# Altium PCB GTU-V1.1-20160526 .PcbDoc (part 2 of 4)
Units mil, origin at the board's own origin, x right, y up, seen from the top; angles counter-clockwise.
Board outline 6299.21 x 4330.71 mil, 4 copper layers (Top Layer, POWER, GND, Bottom Layer); 208 components, 165 nets, 695 pads, 436 vias.
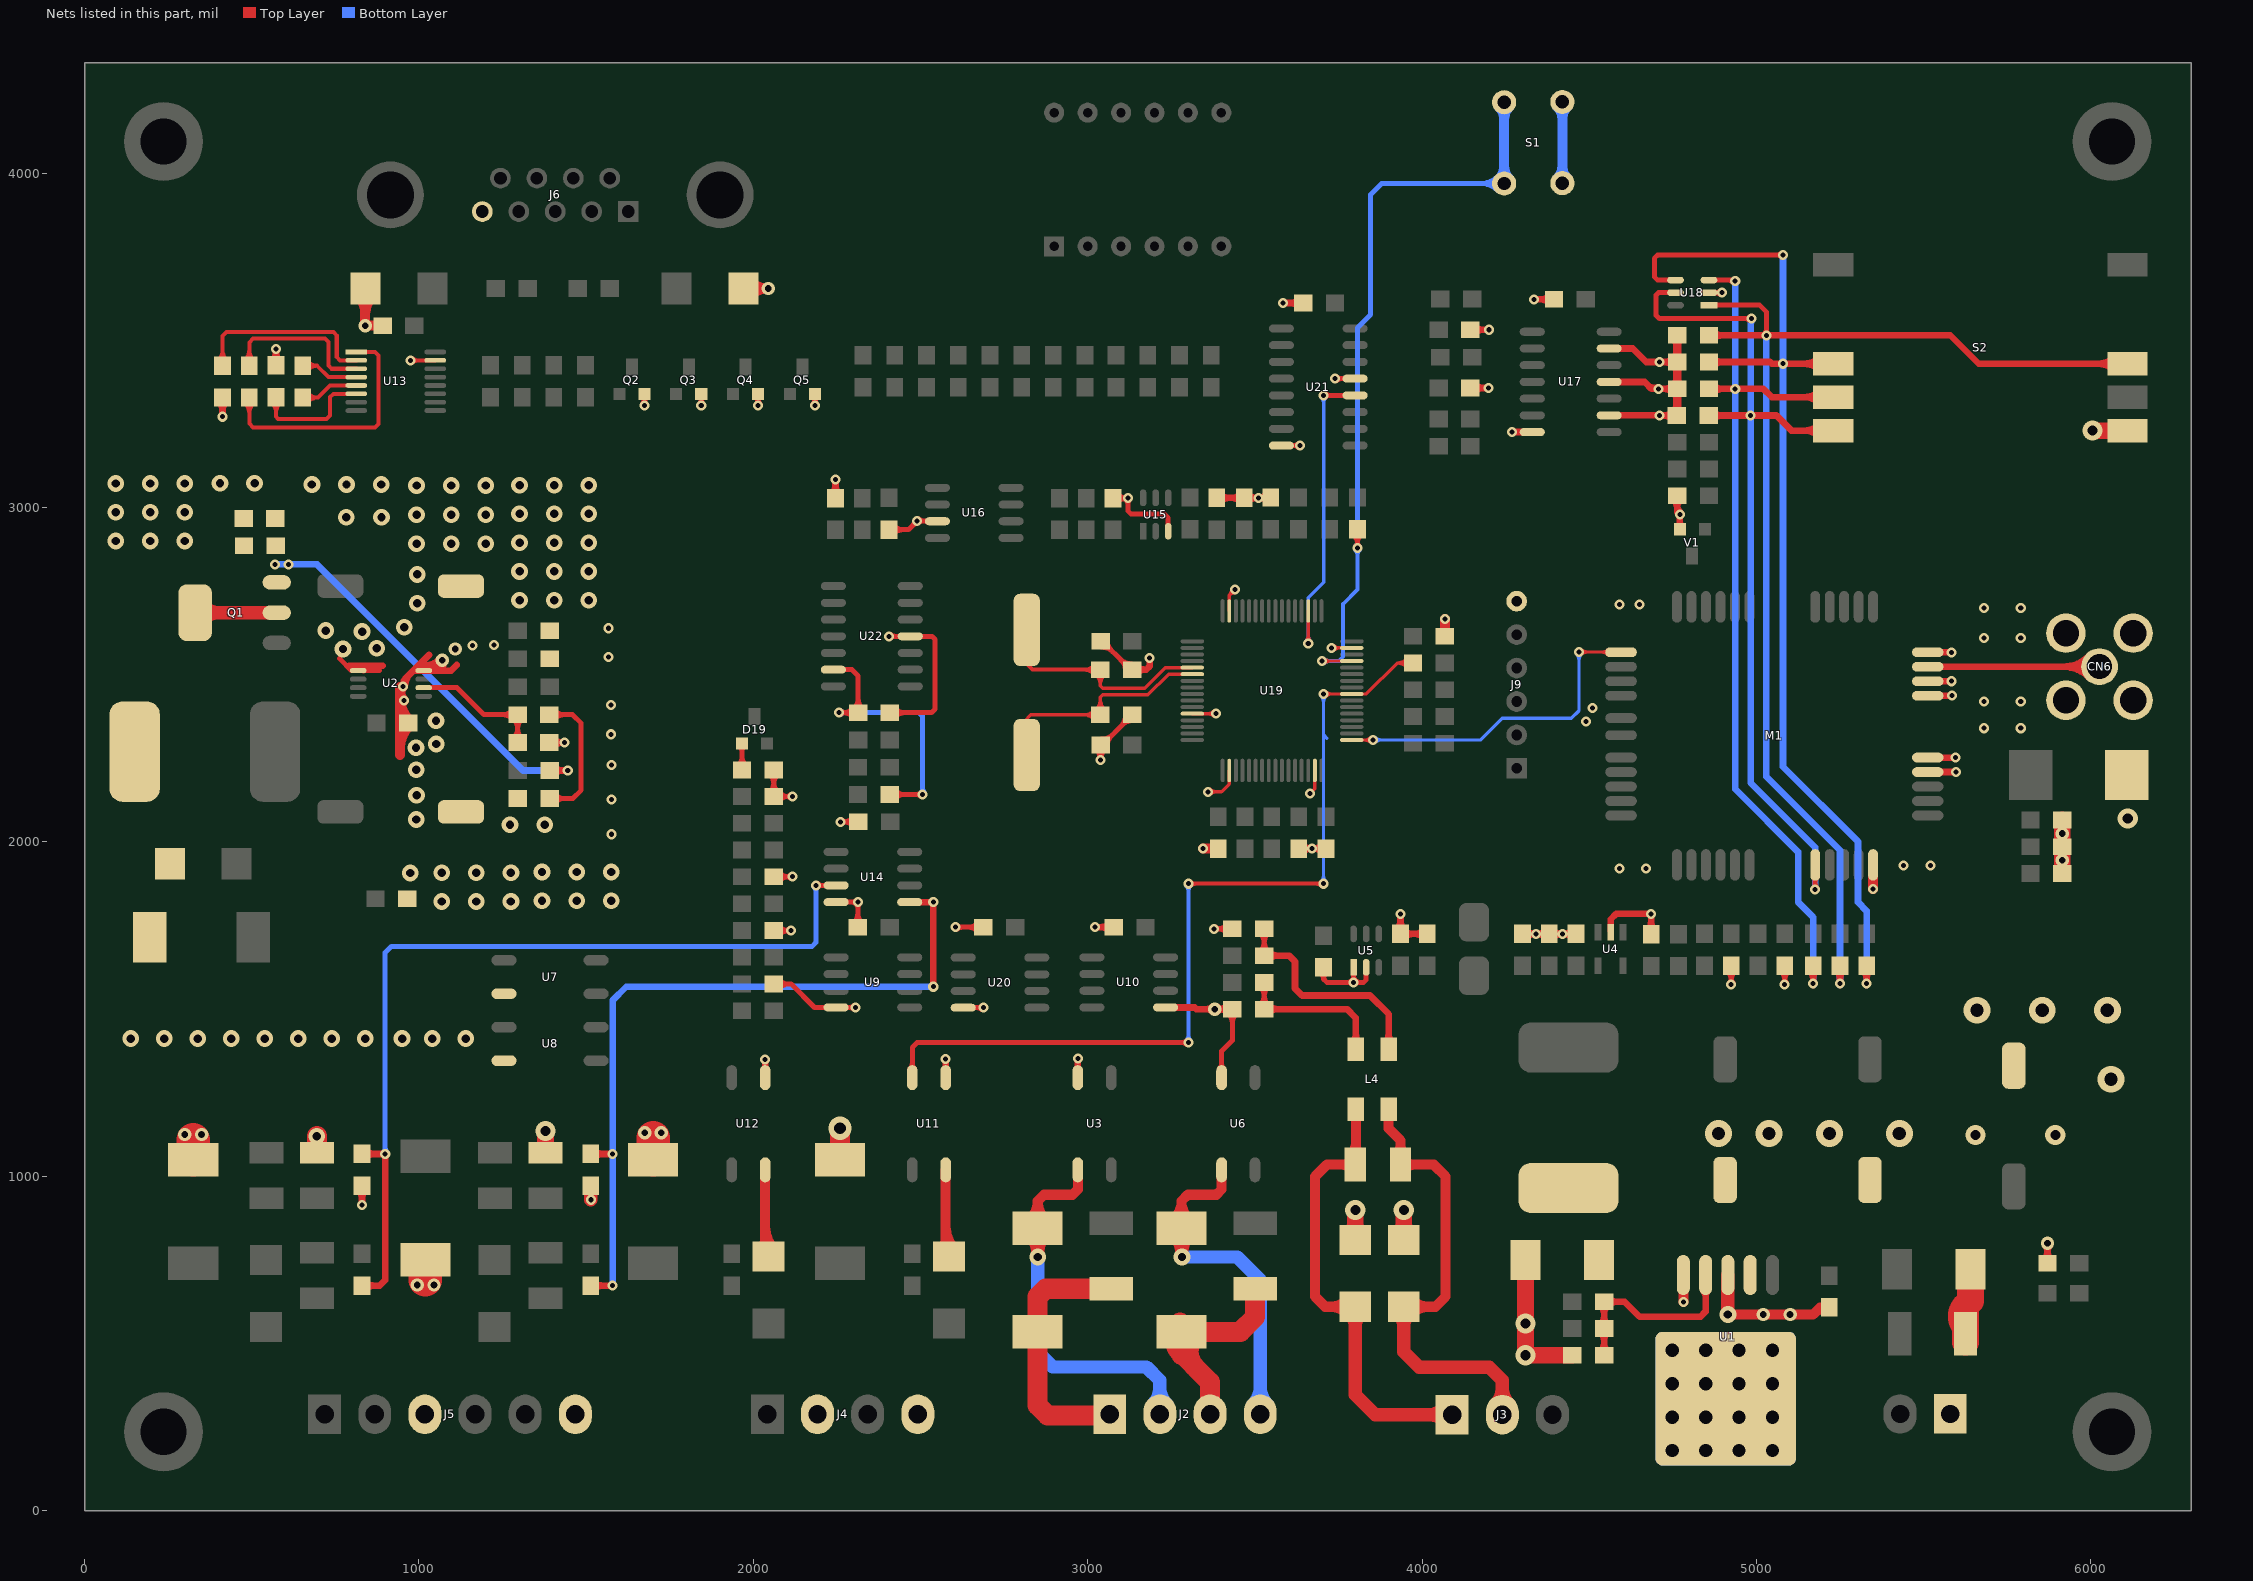
[diagram p4: the nets of this part, all layers, seen from the top]

## Via types
v1: diameter 30, hole 15, Top Layer to Bottom Layer, 277 vias
v2: diameter 50, hole 25, Top Layer to Bottom Layer, 85 vias
v3: diameter 40, hole 20, Top Layer to Bottom Layer, 36 vias
v4: diameter 40, hole 40, Top Layer to Bottom Layer, 16 vias
v5: diameter 80, hole 40, Top Layer to Bottom Layer, 12 vias
v6: diameter 60, hole 30, Top Layer to Bottom Layer, 9 vias
v7: diameter 70, hole 35, Top Layer to Bottom Layer, 1 vias

## Nets (pads, with @x,y where several pads share a name; then routed paths per layer and width w, separated by ;. In a path a pad name is that pad's centre, name@x,y a point inside that pad or via, vN(x,y) a via of type N, cw(c..) or ccw(c..) an arc to the next point about the centre after c; other vN are vias at no path point) (continued)
DK2: R22.1 U11.6 U19.40 | length 3068.8
  Top Layer w10: v1@3705.52,2442.52 3832.52,2442.52 3925,2535 ; v1@3712.07,2434.93 cw(c3730.4,2416.6) 3730.4,2442.52 ; v1@3712.07,2449.07 ccw(c3727.89,2464.89) 3727.89,2442.52 ; R22.1@3955.27,2521.57 ccw(c3925,2494.16) 3925,2535 ; R22.1@3955.27,2548.43 cw(c3925,2575.84) 3925,2535 ; R22.1@3972.6,2535 3925,2535
  Top Layer w12: v1(3301,1875) v1(3705,1875) ; v1@3307.36,1868.64 cw(c3322.73,1853.27) 3322.73,1875 cw(c3322.73,1896.73) v1@3307.36,1881.36 ; v1@3698.64,1868.64 ccw(c3683.27,1853.27) 3683.27,1875 ccw(c3683.27,1896.73) v1@3698.64,1881.36
  Top Layer w15: U11.6@2469.2,1322.51 ccw(c2454.69,1337.02) 2475.21,1337.02 ccw(c2495.73,1337.02) U11.6@2481.22,1322.51 ; U11.6@2475.21,1295 2475.21,1385.21 2490,1400 v1(3301,1400) ; v1@3295.7,1394.7 ccw(c3282.89,1381.89) 3282.89,1400 ccw(c3282.89,1418.11) v1@3295.7,1405.3
  Bottom Layer w10: v1@3697.93,1882.07 ccw(c3680.86,1899.14) 3705,1899.14 ccw(c3729.14,1899.14) v1@3712.07,1882.07 ; v1@3697.93,2434.93 cw(c3680.86,2417.86) 3705,2417.86 cw(c3729.14,2417.86) v1@3712.07,2434.93 ; v1@3705,1873 v1(3705,2442) ; 3705,2320 3715,2310
  Bottom Layer w12: v1@3294.64,1406.36 ccw(c3279.27,1421.73) 3301,1421.73 ccw(c3322.73,1421.73) v1@3307.36,1406.36 ; v1@3294.64,1868.64 cw(c3279.27,1853.27) 3301,1853.27 cw(c3322.73,1853.27) v1@3307.36,1868.64 ; v1(3301,1400) v1(3301,1875)
DLC: U19.51 U21.12 | length 1095.3
  Top Layer w10: v1@3652.3,2600.07 ccw(c3635.23,2617.14) 3659.37,2617.14 ccw(c3683.51,2617.14) v1@3666.44,2600.07 ; v1(3659.37,2593) U19.51@3659.37,2690.87
  Top Layer w15: v1(3705.39,3335.39) U21.12@3799.21,3335.39 ; v1@3710.69,3330.08 cw(c3723.49,3317.28) 3723.49,3335.39 cw(c3723.49,3353.49) v1@3710.69,3340.69
  Bottom Layer w10: v1@3652.3,2600.07 ccw(c3635.23,2617.14) 3659.37,2617.14 ccw(c3683.51,2617.14) v1@3666.44,2600.07 ; v1(3659.37,2593) 3659.37,2730.37 3705.39,2776.39 v1(3705.39,3335.39) ; v1@3698.31,3328.31 cw(c3681.24,3311.24) 3705.39,3311.24 cw(c3729.53,3311.24) v1@3712.46,3328.31
GND: C2.2 C3.2 C5.2 C6.2 C7.2 C8.2 C9.2 C10.2 C11.2 C12.2 C13.2 C14.2 C15.2 C16.2 C17.2 C18.2 C19.1 C20.2 C22.1 C23.1 C25.2 C26.2 C27.2 C28.2 C29.2 C30.2 C31.2 C32.2 C33.2 C34.1 C35.2 C36.2 C37.2 C38.2 C39.2 C40.2 C41.2 C42.2 C43.2 C44.2 C45.2 C46.2 C47.2 C48.2 C49.2 C87.2 CN6.2 CN6.3 CN6.4 CN6.5 D2.A D4.A D7.A D8.A D9.A D10.A D13.A D14.A D15.A D18.A EC1.2 EC2.2 EC3.2 EC4.2 EC5.2 EC6.2 J1.1 J4.2 J4.4 J5.3 J5.6 J6.5 J9.6 LED1.2 M1.31 M1.35 M1.36 M1.37 M1.38 M1.40 Q2.2 Q3.2 Q4.2 Q5.2 R5.2 R6.1 R7.1 R8.1 R9.1 R11.1 R18.1 R32.1 R40.1 R41.1 R49.1 R50.2 R54.1 R55.2 R58.2 R59.2 R60.1 R61.2 S1.1 S1.4 S2.4 U1.0 U1.1@4907.6,335 U1.3 U1.5 U2.4 U2.5 U3.3 U4.2 U5.1 U5.2 U6.3 U7.3 U8.3 U9.4 U10.5 U11.4 U12.4 U13.15 U14.4 U15.3 U16.3 U17.7 U17.9 U17.11 U17.13 U18.2 U19.12 U19.18 U19.31 U19.47 U19.63 U20.4 U21.8 U21.13 U22.11 V1.2 | length 15929.8
  Top Layer w10: U19.12@3312.6,2383.46 v1(3383.46,2383.46) ; v1(3360,2150) 3400,2150 3423.15,2173.15 U19.18@3423.15,2213.86 ; v1@3367.07,2142.93 cw(c3384.14,2125.86) 3384.14,2150 cw(c3384.14,2174.14) v1@3367.07,2157.07 ; v1@3376.39,2376.39 ccw(c3359.32,2359.32) 3359.32,2383.46 ccw(c3359.32,2407.61) v1@3376.39,2390.54 ; U19.63@3423.15,2690.87 3423.15,2738.15 ; v1@3430,2754.91 cw(c3406.61,2754.69) 3423.15,2738.15 ; v1@3439.91,2745 ccw(c3439.69,2721.61) 3423.15,2738.15 ; v1(3440,2755) 3423.15,2738.15 ; v1(3665,2145) 3679.06,2159.06 U19.31@3679.06,2213.86 ; v1@3720.31,2580.31 U19.47@3789.61,2580.31 ; v1@3736.39,2573.24 cw(c3753.46,2556.17) 3753.46,2580.31 cw(c3753.46,2604.46) v1@3736.39,2587.39
  Top Layer w12: v1(974.21,3440) U13.15@1048.71,3440 ; v1@980.58,3433.64 cw(c995.94,3418.27) 995.94,3440 cw(c995.94,3461.73) v1@980.58,3446.36
  Top Layer w15: 763,2548 798.61,2512.39 882.61,2512.39 ; Q2.2@1666.79,3332.58 cw(c1648.86,3314.65) 1674.21,3314.65 cw(c1699.56,3314.65) Q2.2@1681.64,3332.58 ; v1@1668.91,3310.3 ccw(c1656.11,3323.11) 1674.21,3323.11 ccw(c1692.32,3323.11) v1@1679.52,3310.3 ; v1(1674.21,3305) Q2.2@1674.21,3340 ; Q3.2@1836.79,3332.58 cw(c1818.86,3314.65) 1844.21,3314.65 cw(c1869.56,3314.65) Q3.2@1851.64,3332.58 ; v1@1838.91,3310.3 ccw(c1826.11,3323.11) 1844.21,3323.11 ccw(c1862.32,3323.11) v1@1849.52,3310.3 ; v1(1844.21,3305) Q3.2@1844.21,3340 ; Q4.2@2006.79,3332.58 cw(c1988.86,3314.65) 2014.21,3314.65 cw(c2039.56,3314.65) Q4.2@2021.64,3332.58 ; v1@2008.91,3310.3 ccw(c1996.11,3323.11) 2014.21,3323.11 ccw(c2032.32,3323.11) v1@2019.52,3310.3 ; v1(2014.21,3305) Q4.2@2014.21,3340 ; C28.2@2048.84,2148.37 ccw(c2018.96,2178.25) 2061.21,2178.25 ccw(c2103.46,2178.25) C28.2@2073.59,2148.37 ; C87.2@2048.84,2202.63 cw(c2018.96,2172.75) 2061.21,2172.75 cw(c2103.46,2172.75) C87.2@2073.59,2202.63 ; R18.1@2061.21,1575 2113,1575 2183,1505 v1(2306,1505) ; C16.2@2061.21,1735 v1(2112,1735) ; C26.2@2061.21,1896 v1(2117,1896) ; C87.2@2061.21,2215 C28.2@2061.21,2136 v1(2117,2136) ; R18.1@2076.09,1562.63 cw(c2105.96,1532.75) 2105.96,1575 cw(c2105.96,1617.25) R18.1@2076.09,1587.37 ; C16.2@2076.09,1722.63 cw(c2105.96,1692.75) 2105.96,1735 cw(c2105.96,1777.25) C16.2@2076.09,1747.37 ; C26.2@2076.09,1883.63 cw(c2105.96,1853.75) 2105.96,1896 cw(c2105.96,1938.25) C26.2@2076.09,1908.37 ; C28.2@2076.09,2123.63 cw(c2105.96,2093.75) 2105.96,2136 cw(c2105.96,2178.25) C28.2@2076.09,2148.37 ; v1@2106.7,1729.7 ccw(c2093.89,1716.89) 2093.89,1735 ccw(c2093.89,1753.11) v1@2106.7,1740.3 ; v1@2111.7,1890.7 ccw(c2098.89,1877.89) 2098.89,1896 ccw(c2098.89,1914.11) v1@2111.7,1901.3 ; v1@2111.7,2130.7 ccw(c2098.89,2117.89) 2098.89,2136 ccw(c2098.89,2154.11) v1@2111.7,2141.3 ; Q5.2@2176.79,3332.58 cw(c2158.86,3314.65) 2184.21,3314.65 cw(c2209.56,3314.65) Q5.2@2191.64,3332.58 ; v1@2178.91,3310.3 ccw(c2166.11,3323.11) 2184.21,3323.11 ccw(c2202.32,3323.11) v1@2189.52,3310.3 ; v1(2184.21,3305) Q5.2@2184.21,3340 ; U14.4@2247.6,1820 v1(2312.6,1820) C14.2@2312.6,1745 ; v1(2260,2060) C20.2@2314.21,2060 ; v1@2265.3,2054.7 cw(c2278.11,2041.89) 2278.11,2060 cw(c2278.11,2078.11) v1@2265.3,2065.3 ; C20.2@2299.34,2047.63 ccw(c2269.46,2017.75) 2269.46,2060 ccw(c2269.46,2102.25) C20.2@2299.34,2072.37 ; C14.2@2300.22,1757.37 ccw(c2270.35,1787.25) 2312.6,1787.25 ccw(c2354.85,1787.25) C14.2@2324.97,1757.37 ; v1@2300.7,1499.7 ccw(c2287.89,1486.89) 2287.89,1505 ccw(c2287.89,1523.11) v1@2300.7,1510.3 ; v1@2307.3,1825.3 cw(c2294.49,1838.11) 2294.49,1820 cw(c2294.49,1801.89) 2307.3,1814.7 cw(c2294.49,1801.89) 2312.6,1801.89 cw(c2330.7,1801.89) v1@2317.9,1814.7 ; v1(2405,2615) 2534,2615 2543,2606 2543,2397 2532.67,2386.67 C49.2@2408.21,2386.67 ; C33.2@2405.6,2934 2464,2934 v1@2489,2959 ; v1@2410.3,2609.7 cw(c2423.11,2596.89) 2423.11,2615 cw(c2423.11,2633.11) v1@2410.3,2620.3 ; C33.2@2417.97,2921.63 cw(c2447.85,2891.75) 2447.85,2934 cw(c2447.85,2976.25) C33.2@2417.97,2946.37 ; C49.2@2423.09,2374.29 cw(c2452.96,2344.42) 2452.96,2386.67 cw(c2452.96,2428.92) C49.2@2423.09,2399.04 ; v1@2482.5,2960 cw(c2464.39,2960) 2477.2,2947.2 cw(c2490,2934.39) v1@2490,2952.5 ; v1(2490,2960) 2549.6,2960 U16.3@2550.6,2959 ; v1@2495.3,2954.7 cw(c2508.11,2941.89) 2508.11,2960 cw(c2508.11,2978.11) v1@2495.3,2965.3 ; 2511.82,2960 cw(c2511.82,2945.72) U16.3@2521.92,2955.82 ; v1(2605,1745) C39.2@2687.6,1745 ; v1@2610.3,1739.7 cw(c2623.11,1726.89) 2623.11,1745 cw(c2623.11,1763.11) v1@2610.3,1750.3 ; U20.4@2627.6,1504.22 v1@2689.22,1504.22 ; C39.2@2672.72,1732.63 ccw(c2642.85,1702.75) 2642.85,1745 ccw(c2642.85,1787.25) C39.2@2672.72,1757.37 ; v1@2682.92,1498.92 ccw(c2670.11,1486.11) 2670.11,1504.22 ccw(c2670.11,1522.33) v1@2682.92,1509.52 ; C45.2@3038.6,2285 C48.2@3118.6,2365 ; C44.2@3038.6,2605 C47.2@3118.6,2525 ; C45.2@3041.1,2307.5 ccw(c3041.1,2355.78) 3075.24,2321.64 ; C44.2@3041.1,2582.5 cw(c3041.1,2534.22) 3075.24,2568.36 ; C45.2@3058.6,2290 cw(c3094.81,2290) 3069.21,2315.61 ; C44.2@3058.6,2600 ccw(c3094.81,2600) 3069.21,2574.39 ; R41.1@3075.6,3028 v1(3120,3028) 3120,2990 3130,2980 3230,2980 3240.6,2969.4 U15.3@3240.6,2929 ; R41.1@3087.97,3015.63 cw(c3117.85,2985.75) 3117.85,3028 cw(c3117.85,3070.25) R41.1@3087.97,3040.37 ; 3097.66,2545.94 ccw(c3130.1,2578.37) C47.2@3130.1,2532.5 ; 3097.75,2344.15 ccw(c3061.9,2380) C48.2@3112.6,2380 ; 3101.28,2542.31 cw(c3073.97,2515) C47.2@3112.6,2515 ; 3106.2,2352.6 cw(c3130.1,2328.7) C48.2@3130.1,2362.5 ; v1@3114.7,3033.3 cw(c3101.89,3046.11) 3101.89,3028 cw(c3101.89,3009.89) 3114.7,3022.7 cw(c3101.89,3009.89) 3120,3009.89 cw(c3138.11,3009.89) v1@3125.3,3022.7 ; C48.2@3118.6,2370 C48.2@3132.6,2370 ; v1(3377,1740) C18.2@3432.6,1740 ; v1@3382.3,1734.7 cw(c3395.11,1721.89) 3395.11,1740 cw(c3395.11,1758.11) v1@3382.3,1745.3 ; U6.3@3394.2,1322.51 ccw(c3379.69,1337.02) 3400.21,1337.02 ccw(c3420.73,1337.02) U6.3@3406.22,1322.51 ; U6.3@3400.21,1295 3400.21,1374.21 3432.6,1406.6 C17.2@3432.6,1500 ; C18.2@3417.72,1727.63 ccw(c3387.85,1697.75) 3387.85,1740 ccw(c3387.85,1782.25) C18.2@3417.72,1752.37 ; C17.2@3420.22,1487.63 cw(c3390.35,1457.75) 3432.6,1457.75 cw(c3474.85,1457.75) C17.2@3444.97,1487.63 ; R60.1@3546.6,3029 R60.1@3547.6,3030 ; U21.8@3579.21,3185.39 v1(3634.61,3185.39) ; v1@3629.31,3180.08 ccw(c3616.51,3167.28) 3616.51,3185.39 ccw(c3616.51,3203.49) v1@3629.31,3190.69 ; C10.2@3705,1625 3705,1590 ; v1(3740,3385.39) U21.13@3799.21,3385.39 ; v1@3745.3,3380.08 cw(c3758.11,3367.28) 3758.11,3385.39 cw(c3758.11,3403.49) v1@3745.3,3390.69 ; v1@3789.7,1574.7 ccw(c3776.89,1561.89) 3776.89,1580 ccw(c3776.89,1598.11) 3789.7,1585.3 ccw(c3776.89,1598.11) 3795,1598.11 ccw(c3813.11,1598.11) 3800.3,1585.3 ccw(c3813.11,1598.11) 3813.11,1580 ccw(c3813.11,1561.89) v1@3800.3,1574.7 ; v1@3795,1575 U5.1@3795,1625 ; U5.2@3832.5,1625 3832.5,1587.5 3825,1580 3715,1580 3705,1590 ; U18.2@4857.6,3642.5 v1(4896.71,3642.5) ; v1@4891.41,3637.2 ccw(c4878.61,3624.39) 4878.61,3642.5 ccw(c4878.61,3660.61) v1@4891.41,3647.8 ; R54.1@4911.84,1615.13 cw(c4881.96,1585.25) 4924.21,1585.25 cw(c4966.46,1585.25) R54.1@4936.59,1615.13 ; v1@4918.91,1579.09 ccw(c4906.11,1591.89) 4924.21,1591.89 ccw(c4942.32,1591.89) v1@4929.52,1579.09 ; v1(4924.21,1573.79) R54.1@4924.21,1630 ; R50.2@5071.84,1615.13 cw(c5041.96,1585.25) 5084.21,1585.25 cw(c5126.46,1585.25) R50.2@5096.59,1615.13 ; v1@5078.91,1579.09 ccw(c5066.11,1591.89) 5084.21,1591.89 ccw(c5102.32,1591.89) v1@5089.52,1579.09 ; v1(5084.21,1573.79) R50.2@5084.21,1630 ; 3705,1590 cw(c3726.43,1590) 3714.63,1607.89 ccw(c3726.43,1590) 3705,1590 ; 3705,1590 ccw(c3683.57,1590) 3695.37,1607.89 cw(c3683.57,1590) 3705,1590
  Top Layer w20: C22.1@402.11,3315.89 cw(c376.5,3290.29) 412.71,3290.29 cw(c448.93,3290.29) C22.1@423.32,3315.89 ; v1(412.71,3271.5) C22.1@412.71,3329 ; C23.1@562.11,3438.11 ccw(c536.5,3463.71) 572.71,3463.71 ccw(c608.93,3463.71) C23.1@583.32,3438.11 ; C23.1@572.71,3425 v1(572.71,3473.5) ; 792,2527 892,2527 ; C25.2@819.39,958.89 cw(c793.79,933.29) 830,933.29 cw(c866.21,933.29) C25.2@840.61,958.89 ; v1(830,914.21) C25.2@830,972 ; U2.5@833.94,2514.15 cw(c864.96,2483.14) 864.96,2527 ; v1@957.3,2467.55 cw(c972.46,2476.54) 960,2489 1030,2559 ; v1@958,2465 cw(c1011.11,2465) 973.56,2502.56 ; 978.23,2507.23 cw(c996.71,2488.75) U2.4@996.71,2514.89 ; 983.01,2512.01 1096.01,2512.01 1113,2529 ; U2.4@1009.38,2515.16 cw(c1022.79,2513.49) 1022.79,2527 ; U2.4@1029.23,2512.69 cw(c1045.42,2510.68) 1045.42,2527 ; U2.4@1029.94,2514.15 cw(c1060.96,2483.14) v3@1060.96,2527 ; v3@1062,2549 cw(c1018,2582) 1018,2527 v3@1072,2527 ; C6.2@1390,2297.14 v1(1435,2297.14) ; C6.2@1403.11,2286.54 cw(c1428.71,2260.93) 1428.71,2297.14 cw(c1428.71,2333.36) C6.2@1403.11,2307.75 ; U12.4@2035.21,1295 v1(2035.21,1350) ; R49.1@2234.99,3041.11 ccw(c2209.39,3066.71) 2245.6,3066.71 ccw(c2281.81,3066.71) R49.1@2256.21,3041.11 ; R49.1@2245.6,3028 v1(2245.6,3084.4) ; U11.4@2575.21,1295 v1(2575.21,1351) ; U3.3@2970.21,1295 v1(2970.21,1353) ; v1@3020,1745 C15.2@3077.6,1745 ; C45.2@3027.99,2279.39 cw(c3002.39,2253.79) 3038.6,2253.79 cw(c3074.81,2253.79) C45.2@3049.21,2279.39 ; v1(3038.6,2245.6) C45.2@3038.6,2290 ; C15.2@3064.49,1734.39 ccw(c3038.89,1708.79) 3038.89,1745 ccw(c3038.89,1781.21) C15.2@3064.49,1755.61 ; C47.2@3132.6,2515 3175,2515 3185,2525 v1(3185,2550) ; C47.2@3145.71,2504.39 cw(c3171.31,2478.79) 3171.31,2515 cw(c3171.31,2551.21) C47.2@3145.71,2525.61 ; U10.5@3232.6,1505 3320,1505 3325,1500 C17.2@3432.6,1500 C17.2@3427.6,1505 ; v3@3372.93,1492.93 ccw(c3355.86,1475.86) 3355.86,1500 ccw(c3355.86,1524.14) v3@3372.93,1507.07 ; C32.2@3385.6,3029 R60.1@3546.6,3029 ; v3@3387.07,1492.93 cw(c3404.14,1475.86) 3404.14,1500 cw(c3404.14,1524.14) v3@3387.07,1507.07 ; C32.2@3396.21,3018.39 cw(c3421.81,2992.79) 3421.81,3029 cw(c3421.81,3065.21) C32.2@3396.21,3039.61 ; C17.2@3419.49,1489.39 ccw(c3393.89,1463.79) 3393.89,1500 ccw(c3393.89,1536.21) C17.2@3419.49,1510.61 ; C43.2@3456.99,3018.39 ccw(c3431.39,2992.79) 3431.39,3029 ccw(c3431.39,3065.21) C43.2@3456.99,3039.61 ; C43.2@3478.21,3018.39 cw(c3503.81,2992.79) 3503.81,3029 cw(c3503.81,3065.21) C43.2@3478.21,3039.61 ; v1@3508.97,3029 ccw(c3508.97,3068.63) R60.1@3536.99,3040.61 ; v1@3513.8,3029 cw(c3513.8,2996.2) R60.1@3536.99,3019.39 ; v1(3583.39,3611.61) C46.2@3644.21,3611.61 ; C46.2@3631.11,3601.01 ccw(c3605.5,3575.4) 3605.5,3611.61 ccw(c3605.5,3647.83) C46.2@3631.11,3622.22 ; R61.2@3631.35,1980 C41.2@3712.6,1980 ; R61.2@3641.96,1969.39 cw(c3667.56,1943.79) 3667.56,1980 cw(c3667.56,2016.21) R61.2@3641.96,1990.61 ; C41.2@3701.99,1969.39 ccw(c3676.39,1943.79) 3676.39,1980 ccw(c3676.39,2016.21) C41.2@3701.99,1990.61 ; C9.2@3924.39,1738.11 ccw(c3898.79,1763.71) 3935,1763.71 ccw(c3971.21,1763.71) C9.2@3945.61,1738.11 ; v1@3935,1785 C9.2@3935,1725 C8.2@4015,1725 ; C9.2@3945.61,1714.39 cw(c3971.21,1688.79) 3971.21,1725 cw(c3971.21,1761.21) C9.2@3945.61,1735.61 ; C8.2@4004.39,1714.39 ccw(c3978.79,1688.79) 3978.79,1725 ccw(c3978.79,1761.21) C8.2@4004.39,1735.61 ; R58.2@4144.21,3357.61 v1(4198.21,3357.61) ; R59.2@4144.21,3531.61 v1(4199.21,3531.61) ; R58.2@4157.32,3347.01 cw(c4182.93,3321.4) 4182.93,3357.61 cw(c4182.93,3393.83) R58.2@4157.32,3368.22 ; R59.2@4157.32,3521.01 cw(c4182.93,3495.4) 4182.93,3531.61 cw(c4182.93,3567.83) R59.2@4157.32,3542.22 ; v1(4268.6,3225.61) U17.7@4329.21,3225.61 ; C11.2@4300,1725 C13.2@4460,1725 ; C11.2@4310.61,1714.39 cw(c4336.21,1688.79) 4336.21,1725 cw(c4336.21,1761.21) C11.2@4310.61,1735.61 ; v1(4334.6,3622.61) C38.2@4394.21,3622.61 ; C12.2@4369.39,1714.39 ccw(c4343.79,1688.79) 4343.79,1725 ccw(c4343.79,1761.21) C12.2@4369.39,1735.61 ; C38.2@4381.11,3612.01 ccw(c4355.5,3586.4) 4355.5,3622.61 ccw(c4355.5,3658.83) C38.2@4381.11,3633.22 ; C12.2@4390.61,1714.39 cw(c4416.21,1688.79) 4416.21,1725 cw(c4416.21,1761.21) C12.2@4390.61,1735.61 ; C13.2@4449.39,1714.39 ccw(c4423.79,1688.79) 4423.79,1725 ccw(c4423.79,1761.21) C13.2@4449.39,1735.61 ; U17.9@4559.21,3275.61 4708.6,3275.61 v1(4709.21,3275) C34.1@4761.6,3275 C34.1@4762.6,3276 ; U17.11@4559.21,3375.61 4665.6,3375.61 4686.21,3355 C37.2@4762.6,3355 ; U17.13@4559.21,3475.61 4629.6,3475.61 4670.21,3435 C35.2@4762.6,3435 ; U4.2@4563.83,1734.78 4563.83,1768.83 4580,1785 v1(4685,1785) R11.1@4685,1724 ; R11.1@4674.39,1737.11 ccw(c4648.79,1762.71) 4685,1762.71 ccw(c4721.21,1762.71) R11.1@4695.61,1737.11 ; 4676.1,3365.11 ccw(c4694.72,3383.73) v1@4705.22,3359.59 ; C34.1@4748.49,3264.39 ccw(c4722.89,3238.79) 4722.89,3275 ccw(c4722.89,3311.21) C34.1@4748.49,3285.61 ; C37.2@4749.49,3344.39 ccw(c4723.89,3318.79) 4723.89,3355 ccw(c4723.89,3391.21) C37.2@4749.49,3365.61 ; C35.2@4749.49,3424.39 ccw(c4723.89,3398.79) 4723.89,3435 ccw(c4723.89,3471.21) C35.2@4749.49,3445.61 ; R55.2@4751.99,3024.39 cw(c4726.39,2998.79) 4762.6,2998.79 cw(c4798.81,2998.79) R55.2@4773.21,3024.39 ; 4762.6,3010 ccw(c4801.98,3010) v1@4774.13,2982.15 ; R55.2@4762.6,3035 4762.6,2986.61 v1(4770.6,2978.61) V1.2@4770.6,2935 ; V1.2@4764.94,2940.66 ccw(c4751.28,2954.31) 4770.6,2954.31 ccw(c4789.91,2954.31) V1.2@4776.26,2940.66 ; U1.5@4780.93,705 U1.5@4781.21,704.72 ; M1.35@5511.98,2208.91 5595.91,2208.91 v1(5596,2209) ; M1.36@5511.98,2252.21 5594.43,2252.21 v1(5595.21,2253) ; M1.37@5511.98,2437.25 v1(5584.21,2437.25) ; M1.38@5511.98,2480.56 v1(5583.21,2480.56) ; M1.40@5511.98,2567.17 v1(5582.21,2567.17) ; LED1.2@5859.39,750.61 ccw(c5833.79,776.21) 5870,776.21 ccw(c5906.21,776.21) LED1.2@5880.61,750.61 ; v3@5862.93,792.93 cw(c5845.86,775.86) 5870,775.86 cw(c5894.14,775.86) v3@5877.07,792.93 ; LED1.2@5870,740 v3(5870,800)
  Top Layer w25: C34.1@4752.76,3283.84 ccw(c4729.01,3307.59) 4762.6,3307.59 ; C37.2@4753.76,3346.16 cw(c4732.42,3324.82) 4762.6,3324.82 cw(c4792.78,3324.82) C37.2@4771.44,3346.16 ; C37.2@4753.76,3363.84 ccw(c4732.42,3385.18) 4762.6,3385.18 ccw(c4792.78,3385.18) C37.2@4771.44,3363.84 ; C35.2@4753.76,3426.16 cw(c4732.42,3404.82) 4762.6,3404.82 cw(c4792.78,3404.82) C35.2@4771.44,3426.16 ; C35.2@4753.76,3443.84 ccw(c4732.42,3465.18) 4762.6,3465.18 ccw(c4792.78,3465.18) C35.2@4771.44,3443.84 ; C36.2@4753.76,3506.16 cw(c4732.42,3484.82) 4762.6,3484.82 cw(c4792.78,3484.82) C36.2@4771.44,3506.16 ; C34.1@4762.6,3276 C36.2@4762.6,3515 ; 4762.6,3302.76 ccw(c4789.36,3302.76) C34.1@4770.44,3283.84
  Top Layer w30: D14.A@819,3631.29 cw(c770.2,3582.49) 839.21,3582.49 ; 839.21,3577.66 cw(c915.05,3577.66) D14.A@861.43,3631.29 ; D14.A@840.21,3655 839.21,3654 v3(839.21,3544) C19.1@891.21,3544 ; 943,2260 v1@943,2463 ; 943,2276.64 cw(c1044.69,2276.64) C2.2@972.78,2348.54 ; 943,2391.62 cw(c987.38,2391.62) v1(956,2423) cw(c987.38,2454.38) v1@943,2454.38 ; 943,2434.59 ccw(c1044.69,2434.59) C2.2@972.78,2362.69 ; 943,2440.86 cw(c977.14,2440.86) v1(953,2465) ; D15.A@1970.21,3655 v3(2044.21,3655) ; D15.A@1991.43,3633.79 cw(c2042.64,3582.57) 2042.64,3655 cw(c2042.64,3727.43) D15.A@1991.43,3676.21 ; v1(3345,1980) C40.2@3390,1980 ; C42.2@4067.6,2615 v1(4067.6,2666) ; v1(4781.21,624) U1.5@4781.21,704.72 ; v2(4914.27,586.95) 5169.16,586.95 5190.21,608 C3.2@5217.6,608 ; 5176.52,594.31 cw(c5197.89,572.94) C3.2@5212.7,599.28 ; v1(5348.6,1859.39) M1.31@5348.6,1931.35
  Top Layer w40: v1@1513.6,930 C27.2@1513.6,972 ; v2(4914.27,586.95) U1.3@4914.27,705
  Top Layer w50: R40.1@1378.4,1070 v6(1378.4,1135.81) ; D9.A@3785.86,824.14 ccw(c3751.72,858.28) 3800,858.28 ccw(c3848.28,858.28) D9.A@3814.14,824.14 ; D9.A@3800,810 v6(3800,900) ; D10.A@3930.86,824.14 ccw(c3896.72,858.28) 3945,858.28 ccw(c3993.28,858.28) D10.A@3959.14,824.14 ; D10.A@3945,810 v6(3945,900) ; D2.A@4295.29,720.77 cw(c4261.69,687.16) 4309.21,687.16 cw(c4356.74,687.16) D2.A@4323.13,720.77 ; D2.A@4309.21,750 v6(4309.21,465) R5.2@4449.21,465 ; C31.2@5914.21,1905.39 C29.2@5914.21,2065.39 ; v6(6004.21,3230) S2.4@6109.21,3230
  Top Layer w60: R32.1@694.8,1070 v2(694.8,1120) ; D8.A@2259.21,1055 v7(2259.21,1144)
  Top Layer w100: D13.A@325.21,1050 325.21,1110 ; 1019.21,690 D7.A@1019.21,750 ; D18.A@1700.21,1050 1700.21,1115
  Bottom Layer w30: S1.1@4404.36,3984.85 ccw(c4368.51,4020.7) 4419.21,4020.7 ccw(c4469.91,4020.7) S1.1@4434.06,3984.85 ; S1.4@4404.36,4198.15 cw(c4368.51,4162.3) 4419.21,4162.3 cw(c4469.91,4162.3) S1.4@4434.06,4198.15 ; S1.1@4419.21,3970 S1.4@4419.21,4213
  other v1: 1515,930 2688.22,1504.22 3795,1580 4340,1725 4420,1725 3022,1745 3935.43,1785 4590,1920 4670,1920 5440,1930 5520,1930 3670,1980 1576,2023 1576,2126.5 1576,2230 1575,2322 5680,2340 5790,2340 4490,2360 4510,2400 1574,2410 5680,2420 5790,2420 1567,2553 3729.31,2580.31 1160,2588 1225,2589 5680,2610 5790,2610 1567,2639 5680,2700 5790,2700 4590,2710 4650,2710 3510,3029 4707.21,3355 4709.21,3435
  other v2: 138,1412 238.2,1412 338.4,1412 438.6,1412 538.8,1412 639,1412 739.2,1412 839.4,1412 949.6,1412 1039.8,1412 1140,1412 1068,1822 1171.5,1822 1275,1822 1368,1824 1471.5,1824 1575,1824 974,1907 1068,1908 1171.5,1908 1275,1908 1368,1910 1471.5,1910 1575,1910 1272.5,2051 1376,2051 992,2067 993,2140 992,2216 991,2282 1052,2293 1051,2362 773,2577 874,2579 830,2629 721,2632 956,2642 995,2714 1301,2723 1404.5,2723 1508,2723 995,2800 1301,2809 1404.5,2809 1508,2809 993,2892 1096.5,2892 1200,2892 1301,2895 1404.5,2895 1508,2895 93,2900 196.5,2900 300,2900 783,2971 888,2971 993,2978 1096.5,2978 1200,2978 1301,2981 1404.5,2981 1508,2981 93,2986 196.5,2986 300,2986 993,3066 1096.5,3066 1200,3066 1301,3067 1404.5,3067 1508,3067 680,3069 783.5,3069 887,3069 93,3072 196.5,3072 300,3072 405,3073 508.5,3073
  other v3: 5020.21,586.95 5100.21,586.95 995,675 1045,675 300,1125 350,1125 1675,1130 1725,1130 3380,1500 5914.21,1945 5914.21,2025 1070,2543 1109,2577
  other v4: 4747.6,180 4847.6,180 4947.6,180 5047.6,180 4747.6,280 4847.6,280 4947.6,280 5047.6,280 4747.6,380 4847.6,380 4947.6,380 5047.6,380 4747.6,480 4847.6,480 4947.6,480 5047.6,480
  other v5: 4886.21,1128 5037.21,1128 5218.21,1128 5427.21,1128 6060,1290 5659,1497 5854.11,1497 6049.21,1497
  other v6: 4309.21,560 5654.21,1124 5893.21,1124 6110,2070
KEY: R30.1 S1.2 S1.3 U19.45 | length 2795.7
  Top Layer w10: v1@3700,2540.94 U19.45@3789.61,2540.94 ; v1@3707.5,2533.87 cw(c3724.57,2516.8) 3724.57,2540.94 cw(c3724.57,2565.09) v1@3707.5,2548.02
  Top Layer w12: R30.1@3792.91,2919.06 cw(c3760.48,2886.63) 3806.35,2886.63 cw(c3852.22,2886.63) R30.1@3819.78,2919.06 ; v1@3799.98,2884.71 ccw(c3784.62,2900.08) 3806.35,2900.08 ccw(c3828.08,2900.08) v1@3812.71,2884.71 ; v1(3806.35,2878.35) R30.1@3806.35,2935
  Bottom Layer w12: v1@3700,2540 v1@3700.43,2540 ; v1(3700.43,2540.94) 3750.94,2540.94 3764,2554 3764,2712 3806.35,2754.35 v1(3806.35,2878.35) ; v1@3706.79,2534.58 cw(c3722.15,2519.22) 3722.15,2540.94 cw(c3722.15,2562.67) v1@3706.79,2547.31 ; v1@3799.98,2871.98 cw(c3784.62,2856.62) 3806.35,2856.62 cw(c3828.08,2856.62) v1@3812.71,2871.98
  Bottom Layer w15: v1@3801.05,2883.65 ccw(c3788.24,2896.45) 3806.35,2896.45 ccw(c3824.45,2896.45) v1@3811.65,2883.65 ; v1(3806.35,2878.35) 3806.35,3537.35 3846,3577 3846,3936 3879,3969 S1.2@4245.21,3969 ; S1.2@4225.06,3948.85 ccw(c4176.41,3900.19) 4176.41,3969 ccw(c4176.41,4037.81) S1.2@4225.06,3989.15
  Bottom Layer w30: S1.2@4230.36,3983.85 ccw(c4194.51,4019.7) 4245.21,4019.7 ccw(c4295.91,4019.7) S1.2@4260.06,3983.85 ; S1.3@4230.36,4197.15 cw(c4194.51,4161.3) 4245.21,4161.3 cw(c4295.91,4161.3) S1.3@4260.06,4197.15 ; S1.2@4245.21,3969 S1.3@4245.21,4212
M35STATUS: M1.12 U19.33 | length 1204.5
  Top Layer w10: U19.33@3789.61,2304.72 3852.72,2304.72 v1(3853,2305) ; 3828.19,2304.72 ccw(c3828.19,2329.81) v1@3845.93,2312.07 ; 3829.52,2304.72 cw(c3829.52,2281.52) v1@3845.93,2297.93 ; v1(4469,2568) M1.12@4593.83,2568 ; v1@4476.07,2560.93 cw(c4493.14,2543.86) 4493.14,2568 cw(c4493.14,2592.14) v1@4476.07,2575.07 ; 4536.61,2568 cw(c4536.61,2541.61) M1.12@4555.28,2560.27 ; 4540.61,2568 ccw(c4540.61,2588.75) M1.12@4555.28,2574.08
  Bottom Layer w10: v1(3853,2305) 4175,2305 4240,2370 4446,2370 4469,2393 v1(4469,2568) ; v1@3860.07,2297.93 cw(c3877.14,2280.86) 3877.14,2305 cw(c3877.14,2329.14) v1@3860.07,2312.07 ; v1@4461.93,2560.93 cw(c4444.86,2543.86) 4469,2543.86 cw(c4493.14,2543.86) v1@4476.07,2560.93
NetBT1_1: C87.1 D19.1 | length 186
  Top Layer w15: C87.1@1953.84,2227.37 ccw(c1924.48,2256.74) 1966,2256.74 ; D19.1@1958.58,2287.58 cw(c1940.65,2269.65) 1966,2269.65 cw(c1991.35,2269.65) D19.1@1973.42,2287.58 ; C87.1@1966,2215.21 D19.1@1966,2295 ; 1966,2257.76 ccw(c2008.97,2257.76) C87.1@1978.59,2227.37
NetC1_2: C1.2 R1.1 R5.1 U1.4 | length 918.8
  Top Layer w20: R5.1@4533.61,475.61 ccw(c4508,501.21) 4544.21,501.21 ccw(c4580.43,501.21) R5.1@4554.82,475.61 ; C1.2@4533.61,534.39 cw(c4508,508.79) 4544.21,508.79 cw(c4580.43,508.79) C1.2@4554.82,534.39 ; C1.2@4533.61,555.61 ccw(c4508,581.21) 4544.21,581.21 ccw(c4580.43,581.21) C1.2@4554.82,555.61 ; R1.1@4533.61,614.39 cw(c4508,588.79) 4544.21,588.79 cw(c4580.43,588.79) R1.1@4554.82,614.39 ; R5.1@4544.21,465 R1.1@4544.21,625 4605.21,625 4650.21,580 4832.21,580 4847.6,595.39 U1.4@4847.6,705 ; R1.1@4557.32,614.39 cw(c4582.93,588.79) 4582.93,625 cw(c4582.93,661.21) R1.1@4557.32,635.61 ; U1.4@4840.82,657.81 cw(c4824.46,641.45) 4847.6,641.45 cw(c4870.73,641.45) U1.4@4854.38,657.81
NetC4_1: C4.1 C6.1 U2.2 | length 596.8
  Top Layer w15: U2.2@1014.21,2461.2 1113.8,2461.2 1194.29,2380.71 C4.1@1295,2380.71 C6.1@1295,2297.14 ; C4.1@1280.13,2368.34 ccw(c1250.25,2338.47) 1250.25,2380.71 ccw(c1250.25,2422.96) C4.1@1280.13,2393.09 ; C6.1@1282.63,2309.52 ccw(c1252.75,2339.39) 1295,2339.39 ccw(c1337.25,2339.39) C6.1@1307.37,2309.52 ; C4.1@1282.63,2368.34 cw(c1252.75,2338.47) 1295,2338.47 cw(c1337.25,2338.47) C4.1@1307.37,2368.34
NetC4_2: C4.2 R9.2 | length 542.7
  Top Layer w15: C4.2@1390,2380.71 1459.29,2380.71 1485,2355 1485,2155 1460,2130 R9.2@1391,2130 ; C4.2@1404.87,2368.34 cw(c1434.75,2338.47) 1434.75,2380.71 cw(c1434.75,2422.96) C4.2@1404.87,2393.09 ; R9.2@1405.87,2117.63 cw(c1435.75,2087.75) 1435.75,2130 cw(c1435.75,2172.25) R9.2@1405.87,2142.37
NetC7_1: C7.1 Q1.3 R3.2 R8.2 | length 1241.2
  Top Layer w20: R3.2@1391,2213.57 v1(1445,2213.57) ; R3.2@1404.11,2202.96 cw(c1429.71,2177.36) 1429.71,2213.57 cw(c1429.71,2249.78) R3.2@1404.11,2224.18
  Bottom Layer w20: v1(570,2830) 695,2830 1311.43,2213.57 v1(1445,2213.57)
  other v1: 610,2830
NetC17_1: C17.1 L4.2 R20.1 | length 704.9
  Top Layer w15: C17.1@3515.22,1512.37 ccw(c3485.35,1542.25) 3527.6,1542.25 ccw(c3569.85,1542.25) C17.1@3539.97,1512.37 ; R20.1@3515.22,1567.63 cw(c3485.35,1537.75) 3527.6,1537.75 cw(c3569.85,1537.75) R20.1@3539.97,1567.63 ; C17.1@3527.6,1500 R20.1@3527.6,1580
  Top Layer w20: C17.1@3527.6,1500 3775,1500 3801.57,1473.43 L4.2@3801.57,1380 ; C17.1@3540.71,1489.39 cw(c3566.31,1463.79) 3566.31,1500 cw(c3566.31,1536.21) C17.1@3540.71,1510.61 ; L4.2@3790.97,1400.61 ccw(c3765.36,1426.21) 3801.57,1426.21 ccw(c3837.79,1426.21) L4.2@3812.18,1400.61
NetC18_1: C18.1 L4.1 R21.1 | length 923.2
  Top Layer w15: R21.1@3515.22,1672.37 ccw(c3485.35,1702.25) 3527.6,1702.25 ccw(c3569.85,1702.25) R21.1@3539.97,1672.37 ; C18.1@3515.22,1727.63 cw(c3485.35,1697.75) 3527.6,1697.75 cw(c3569.85,1697.75) C18.1@3539.97,1727.63 ; R21.1@3527.6,1660 C18.1@3527.6,1740
  Top Layer w20: R21.1@3527.6,1660 3602,1660 3620,1642 3620,1562 3641,1541 3844,1541 3900,1485 L4.1@3900,1380 ; R21.1@3540.71,1649.39 cw(c3566.31,1623.79) 3566.31,1660 cw(c3566.31,1696.21) R21.1@3540.71,1670.61 ; L4.1@3889.39,1400.61 ccw(c3863.79,1426.21) 3900,1426.21 ccw(c3936.21,1426.21) L4.1@3910.61,1400.61
NetC21_1: C21.1 U13.1 | length 820.6
  Top Layer w12: C21.1@479.28,3313.06 cw(c446.84,3280.63) 492.71,3280.63 cw(c538.58,3280.63) C21.1@506.15,3313.06 ; C21.1@492.71,3329 492.71,3251.5 504.21,3240 869.21,3240 879.21,3250 879.21,3455 869.21,3465 U13.1@812.71,3465
NetC21_2: C21.2 U13.3 | length 544.6
  Top Layer w12: C21.2@479.28,3439.94 ccw(c446.84,3472.37) 492.71,3472.37 ccw(c538.58,3472.37) C21.2@506.15,3439.94 ; C21.2@492.71,3424 492.71,3493.5 504.21,3505 719.21,3505 729.21,3495 729.21,3425 739.21,3415 U13.3@812.71,3415
NetC22_2: C22.2 U13.2 | length 639.6
  Top Layer w12: C22.2@399.28,3439.94 ccw(c366.84,3472.37) 412.71,3472.37 ccw(c458.58,3472.37) C22.2@426.15,3439.94 ; C22.2@412.71,3424 412.71,3513.5 424.21,3525 744.21,3525 754.21,3515 754.21,3450 764.21,3440 U13.2@812.71,3440
NetC23_2: C23.2 U13.6 | length 436.5
  Top Layer w12: C23.2@559.28,3314.06 cw(c526.84,3281.63) 572.71,3281.63 cw(c618.58,3281.63) C23.2@586.15,3314.06 ; C23.2@572.71,3330 572.71,3271.5 579.21,3265 724.21,3265 734.21,3275 734.21,3330 744.21,3340 U13.6@812.71,3340
NetC24_1: C24.1 U13.5 | length 246.1
  Top Layer w12: C24.1@652.71,3329 698.21,3329 ; C24.1@666.23,3315.64 cw(c698.21,3284.02) 698.21,3329 ; C24.1@666.23,3342.36 ccw(c698.21,3373.98) 698.21,3329 ; U13.5@812.71,3365 734.21,3365 698.21,3329
NetC24_2: C24.2 U13.4 | length 238
  Top Layer w12: C24.2@652.71,3424 695.21,3424 ; C24.2@666.87,3411.33 cw(c695.21,3385.97) 695.21,3424 ; C24.2@666.87,3436.67 ccw(c695.21,3462.03) 695.21,3424 ; U13.4@812.71,3390 729.21,3390 695.21,3424
NetC25_1: C25.1 R29.1 U14.3 | length 2855.5
  Top Layer w15: v1(2187,1870) U14.3@2247.6,1870 ; v1@2192.3,1864.7 cw(c2205.11,1851.89) 2205.11,1870 cw(c2205.11,1888.11) v1@2192.3,1875.3
  Top Layer w20: R29.1@830,673 882.21,673 899.21,690 v1(899.21,1067) C25.1@830,1067 ; R29.1@840.61,662.39 cw(c866.21,636.79) 866.21,673 cw(c866.21,709.21) R29.1@840.61,683.61 ; C25.1@840.61,1056.39 cw(c866.21,1030.79) 866.21,1067 cw(c866.21,1103.21) C25.1@840.61,1077.61
  Bottom Layer w15: v1@893.91,1072.3 ccw(c881.11,1085.11) 899.21,1085.11 ccw(c917.32,1085.11) v1@904.52,1072.3 ; v1(899.21,1067) 899.21,1669.21 918,1688 2176,1688 2187,1699 v1(2187,1870) ; v1@2181.7,1864.7 cw(c2168.89,1851.89) 2187,1851.89 cw(c2205.11,1851.89) v1@2192.3,1864.7
NetC27_1: C27.1 R38.1 U14.5 | length 2396.5
  Top Layer w20: R38.1@1513.6,673 v1(1578.21,673) ; C27.1@1513.6,1067 v1(1578.21,1067) ; R38.1@1524.21,662.39 cw(c1549.81,636.79) 1549.81,673 cw(c1549.81,709.21) R38.1@1524.21,683.61 ; C27.1@1524.21,1056.39 cw(c1549.81,1030.79) 1549.81,1067 cw(c1549.81,1103.21) C27.1@1524.21,1077.61 ; U14.5@2467.6,1820 v1(2538,1820) v1(2538,1567)
  Bottom Layer w20: v1@1579.21,671.79 1579.21,1526.21 1620,1567 v1(2538,1567)
NetC34_2: C34.2 M1.27 S2.1 U18.5 | length 2917
  Top Layer w15: U18.5@4757.6,3642.5 4706.71,3642.5 4699.21,3635 4699.21,3575 4709.21,3565 v1(4984.21,3565) ; v1@4978.91,3559.7 ccw(c4966.11,3546.89) 4966.11,3565 ccw(c4966.11,3583.11) v1@4978.91,3570.3 ; v1@5170.07,1862.46 ccw(c5157.26,1875.26) 5175.37,1875.26 ccw(c5193.48,1875.26) v1@5180.67,1862.46 ; M1.27@5170.23,1893.73 cw(c5157.83,1881.33) 5175.37,1881.33 cw(c5192.91,1881.33) M1.27@5180.51,1893.73 ; v1(5175.37,1857.16) M1.27@5175.37,1931.35
  Top Layer w20: C34.2@4856.6,3275 5059.21,3275 5104.21,3230 S2.1@5229.29,3230 ; C34.2@4869.71,3264.39 cw(c4895.31,3238.79) 4895.31,3275 cw(c4895.31,3311.21) C34.2@4869.71,3285.61 ; S2.1@5186.61,3212.32 ccw(c5143.94,3169.64) 5143.94,3230 ccw(c5143.94,3290.36) S2.1@5186.61,3247.68
  Bottom Layer w20: 4982.21,3548.1 cw(c5001.11,3548.1) v1@4987.75,3561.46 ; v1@4982.21,3567 4982.21,2177 5175.37,1983.84 v1(5175.37,1857.16)
  other v1: 4982.21,3275
NetC35_1: C35.1 R42.2 S2.3 U18.4 | length 3474.1
  Top Layer w15: U18.4@4757.6,3680 4704.21,3680 4694.21,3690 4694.21,3745 4704.21,3755 v1(5079.21,3755) ; v1@5073.91,3749.7 ccw(c5061.11,3736.89) 5061.11,3755 ccw(c5061.11,3773.11) v1@5073.91,3760.3
  Top Layer w20: C35.1@4857.6,3435 5040.21,3435 5045.21,3430 S2.3@5229.29,3430 S2.3@5224.29,3435 ; C35.1@4870.71,3424.39 cw(c4896.31,3398.79) 4896.31,3435 cw(c4896.31,3471.21) C35.1@4870.71,3445.61 ; S2.3@5186.61,3412.32 ccw(c5143.94,3369.64) 5143.94,3430 ccw(c5143.94,3490.36) S2.3@5186.61,3447.68 ; R42.2@5318.61,1616.89 cw(c5293,1591.29) 5329.21,1591.29 cw(c5365.43,1591.29) R42.2@5339.82,1616.89 ; v1@5329.21,1572 R42.2@5329.21,1630
  Bottom Layer w20: v1(5079.21,3755) 5079.21,2225 5303.21,2001 5303.21,1820 5329.21,1794 v1@5329.21,1572
  other v1: 5329.21,1577 5079.21,3430
NetC36_1: C36.1 R45.2 S2.6 U18.1 | length 3865.9
  Top Layer w15: U18.1@4857.6,3605 5009.21,3605 5029.21,3585 v1(5029.21,3515) ; v1@5023.91,3520.3 ccw(c5011.11,3533.11) 5029.21,3533.11 ccw(c5047.32,3533.11) v1@5034.52,3520.3
  Top Layer w20: C36.1@4857.6,3515 5579.21,3515 5664.21,3430 S2.6@6109.21,3430 ; C36.1@4870.71,3504.39 cw(c4896.31,3478.79) 4896.31,3515 cw(c4896.31,3551.21) C36.1@4870.71,3525.61 ; R45.2@5238.61,1616.89 cw(c5213,1591.29) 5249.21,1591.29 cw(c5285.43,1591.29) R45.2@5259.82,1616.89 ; v1@5249.21,1572 R45.2@5249.21,1630 ; S2.6@6066.53,3412.32 ccw(c6023.86,3369.64) 6023.86,3430 ccw(c6023.86,3490.36) S2.6@6066.53,3447.68
  Bottom Layer w20: v1(5029.21,3515) 5029.21,2195 5249.21,1975 v1@5249.21,1572
  other v1: 5249.21,1577
NetC37_1: C37.1 R48.2 S2.2 U18.3 | length 2951.3
  Top Layer w15: U18.3@4857.6,3680 v1@4936.21,3680 ; 4913.28,3680 cw(c4913.28,3655.07) v1@4930.91,3672.7
  Top Layer w20: C37.1@4857.6,3355 5020.21,3355 5045.21,3330 S2.2@5229.29,3330 ; C37.1@4870.71,3344.39 cw(c4896.31,3318.79) 4896.31,3355 cw(c4896.31,3391.21) C37.1@4870.71,3365.61 ; R48.2@5158.61,1616.89 cw(c5133,1591.29) 5169.21,1591.29 cw(c5205.43,1591.29) R48.2@5179.82,1616.89 ; v1@5169.21,1571 R48.2@5169.21,1630 ; S2.2@5186.61,3312.32 ccw(c5143.94,3269.64) 5143.94,3330 ccw(c5143.94,3390.36) S2.2@5186.61,3347.68
  Bottom Layer w20: v1(4936.21,3678) 4936.21,2158 5124.21,1970 5124.21,1820 5169.21,1775 v1@5169.21,1571
  other v1: 5169.21,1576 4936.21,3355
NetC47_1: C47.1 U19.5 Y1.2 | length 797.1
  Top Layer w10: C47.1@3023.6,2500.71 cw(c2990.97,2467.4) 3037.6,2467.4 ; C47.1@3037.6,2520 3037.6,2467.4 ; C47.1@3051.6,2500.71 ccw(c3084.23,2467.4) 3037.6,2467.4 ; U19.5@3312.6,2521.26 3231.26,2521.26 3170,2460 3045,2460 3037.6,2467.4
  Top Layer w12: Y1.2@2817.6,2540 2817.6,2570 2820,2567.6 2820,2530 2835,2515 C47.1@3037.6,2515 ; C47.1@3021.66,2501.56 ccw(c2989.23,2469.13) 2989.23,2515 ccw(c2989.23,2560.87) C47.1@3021.66,2528.44
NetC48_1: C48.1 U19.6 Y1.1 | length 881
  Top Layer w10: Y1.1@2817.6,2330 2810,2337.6 Y1.1@2810,2360 ; Y1.1@2820,2340 2810,2350 Y1.1@2810,2360 ; C48.1@3020.96,2365.86 ccw(c2986.81,2331.72) 2986.81,2380 ccw(c2986.81,2428.28) C48.1@3020.96,2394.14 ; C48.1@3023.46,2394.14 ccw(c2989.31,2428.28) 3037.6,2428.28 ccw(c3085.88,2428.28) C48.1@3051.74,2394.14 ; C48.1@3037.6,2370 3037.6,2432.6 3045,2440 3180,2440 3241.57,2501.57 U19.6@3312.6,2501.57 ; C48.1@3037.6,2380 2830,2380 Y1.1@2810,2360
  Top Layer w30: Y1.1@2817.6,2260 Y1.1@2817.6,2330
NetC49_1: C49.1 R77.1 U22.6 | length 1148.8
  Top Layer w15: U22.6@2239.21,2515 2295,2515 2313.21,2496.79 C49.1@2313.21,2386.67 v1@2256,2386.67 ; v1@2261.3,2381.7 cw(c2273.3,2369.7) 2273.3,2386.67 ; v1@2261.3,2392.3 ccw(c2274.91,2405.91) 2274.91,2386.67 ; C49.1@2298.34,2374.29 ccw(c2268.46,2344.42) 2268.46,2386.67 ccw(c2268.46,2428.92) C49.1@2298.34,2399.04 ; C49.1@2300.84,2399.04 ccw(c2270.96,2428.92) 2313.21,2428.92 ccw(c2355.46,2428.92) C49.1@2325.59,2399.04 ; R77.1@2408,2142 2506,2142 v1(2506.33,2141.67) ; R77.1@2422.87,2129.63 cw(c2452.75,2099.75) 2452.75,2142 cw(c2452.75,2184.25) R77.1@2422.87,2154.37 ; 2487.42,2142 cw(c2487.42,2122.76) v1@2501.03,2136.36 ; 2489.03,2142 ccw(c2489.03,2158.97) v1@2501.03,2146.97
  Bottom Layer w15: v1(2256,2387) 2495,2387 2506,2376 v1@2506,2142 ; v1@2261.3,2381.7 cw(c2274.11,2368.89) 2274.11,2387 cw(c2274.11,2405.11) v1@2261.3,2392.3 ; v1@2501.03,2146.97 ccw(c2489.03,2158.97) 2506,2158.97 ; 2506,2160.58 ccw(c2525.24,2160.58) v1@2511.64,2146.97
NetCN6_1: CN6.1 M1.39 | length 779.1
  Top Layer w20: M1.39@5511.98,2524 CN6.1@6025.6,2524 ; CN6.1@5993.78,2492.18 ccw(c5916.96,2415.36) 5916.96,2524 ccw(c5916.96,2632.64) CN6.1@5993.78,2555.82 ; CN6.1@6007.92,2506.32 ccw(c5965.24,2463.64) 5965.24,2524 ccw(c5965.24,2584.36) CN6.1@6007.92,2541.68
NetD1_A: D1.A PTC1.2 | length 361.4
  Top Layer w80: PTC1.2@5619.79,557.86 cw(c5692.15,574.83) 5639.6,627.38 ; PTC1.2@5620.66,556 cw(c5655.19,581.92) 5624.66,612.45 ; PTC1.2@5624.66,504 5624.66,612.45 ; D1.A@5639.6,722 5639.6,627.39 ; 5624.66,612.45 5639.6,627.39
NetD2_K: D2.K L1.1 U1.2
NetD3_A: D3.A L2.1 Q1.2 Q1.4 | length 357.9
  Top Layer w40: Q1.4@330.9,2685.55 Q1.2@575,2685.55 ; Q1.4@352.12,2664.34 cw(c403.33,2613.12) 403.33,2685.55 cw(c403.33,2757.98) Q1.4@352.12,2706.76
NetD5_A: D5.A J2.2 U3.4 | length 1506.1
  Top Layer w30: D5.A@2826.23,870.49 ccw(c2773.99,926) 2850.21,926 ; D5.A@2850.21,845 2850.21,926 ; D5.A@2874.2,870.49 cw(c2926.43,926) 2850.21,926 ; U3.4@2970.21,1019.41 2970.21,961 2954.21,945 2869.21,945 2850.21,926
  Top Layer w40: D5.A@2829,823.79 cw(c2777.79,772.57) 2850.21,772.57 cw(c2922.64,772.57) D5.A@2871.43,823.79 ; v2(2850.21,758.79) D5.A@2850.21,845
  Bottom Layer w40: v2(2850.21,758.79) 2850.21,474.79 2895,430 3175.76,430 3215.76,390 3215.76,285.76 J2.2@3210,280 ; J2.2@3195.11,318.88 ccw(c3145.24,368.75) 3215.76,368.75 ccw(c3286.29,368.75) J2.2@3236.42,318.88
NetD5_K: D5.K J2.1 PTC2.2 | length 830.1
  Top Layer w60: 3011.21,285 ccw(c3011.21,342.94) J2.1@3052.18,301.97 ; J2.1@3065.76,288.39 3062.38,285 2880,285 2850.21,314.79 2850.21,640.21 2873.94,663.94 PTC2.2@3070.21,663.94
NetD6_A: D6.A J2.4 U6.4 | length 1335.3
  Top Layer w30: D6.A@3256.23,870.49 ccw(c3203.99,926) 3280.21,926 ; D6.A@3280.21,845 3280.21,926 ; D6.A@3304.2,870.49 cw(c3356.43,926) 3280.21,926 ; U6.4@3400.21,1019.41 3400.21,961 3384.21,945 3299.21,945 3280.21,926
  Top Layer w40: D6.A@3259,823.79 cw(c3203.47,768.26) v2@3282,768.26 ; v2(3282,758.79) D6.A@3282,845 ; v2@3282,776.89 cw(c3348.32,776.89) D6.A@3301.43,823.79
  Bottom Layer w40: v2@3280.21,758.79 3446.98,758.79 3515.76,690 J2.4@3515.76,327.76 ; J2.4@3495.11,318.88 ccw(c3445.24,368.75) 3515.76,368.75 ccw(c3586.29,368.75) J2.4@3536.42,318.88
NetD6_K: D6.K J2.3 PTC3.2 | length 831.5
  Top Layer w60: D6.K@3276.27,562.61 ccw(c3322.73,518.29) 3277.33,472.89 ; 3280.21,465.36 cw(c3336.6,465.36) D6.K@3313.43,516.77 ; D6.K@3319.68,521.19 ccw(c3367.19,475.87) 3320.76,429.45 ; J2.3@3365.76,327.76 3365.76,384.45 3280.21,470 D6.K@3280.21,535 3456.21,535 3500.21,579 PTC3.2@3500.21,663.94
NetD9_K: D9.K J3.1 L4.3 R19.1 | length 1817.1
  Top Layer w30: D9.K@3776.29,588.79 ccw(c3725.07,537.57) 3725.07,610 ccw(c3725.07,682.43) D9.K@3776.29,631.21 ; R19.1@3788.19,1022.98 ccw(c3759.17,993.96) 3759.17,1035 ccw(c3759.17,1076.04) R19.1@3788.19,1047.02 ; R19.1@3788.19,1066.02 ccw(c3755.88,1098.33) 3801.57,1098.33 ; D9.K@3800,610 3710,610 3680,640 3680,1000 3715,1035 R19.1@3800.21,1035 ; R19.1@3801.57,1036.36 L4.3@3801.57,1200.87 ; 3801.57,1091.75 ccw(c3837.97,1091.75) R19.1@3812.23,1066.02
  Top Layer w40: D9.K@3782.32,592.32 cw(c3739.64,549.64) 3800,549.64 cw(c3860.36,549.64) D9.K@3817.68,592.32 ; D9.K@3800,610 3800,347.4 3860,287.4 J3.1@4089.76,287.4 ; J3.1@4069.11,266.75 ccw(c4019.24,216.88) 4019.24,287.4 ccw(c4019.24,357.93) J3.1@4069.11,308.06
NetD10_K: D10.K J3.2 L4.4 R19.2 | length 1843.2
  Top Layer w30: L4.4@3900,1200.87 3900,1143 3935.21,1107.79 R19.2@3935.21,1035 4035,1035 4070,1000 4070,640 4040,610 D10.K@3945,610 ; R19.2@3923.19,1066.02 ccw(c3894.17,1095.04) 3935.21,1095.04 ccw(c3976.25,1095.04) R19.2@3947.23,1066.02 ; R19.2@3947.23,1022.98 cw(c3976.25,993.96) 3976.25,1035 cw(c3976.25,1076.04) R19.2@3947.23,1047.02 ; D10.K@3968.71,588.79 cw(c4019.93,537.57) 4019.93,610 cw(c4019.93,682.43) D10.K@3968.71,631.21
  Top Layer w40: D10.K@3927.32,592.32 cw(c3884.64,549.64) 3945,549.64 cw(c4005.36,549.64) D10.K@3962.68,592.32 ; D10.K@3945,610 3945,475 3991.15,428.85 4201.15,428.85 4239.76,390.24 J3.2@4239.76,287.4 ; J3.2@4219.11,317.9 ccw(c4169.24,367.77) 4239.76,367.77 ccw(c4310.29,367.77) J3.2@4260.42,317.9
NetD11_A: D11.A U11.3 | length 387.3
  Top Layer w30: D11.A@2561.5,781.21 ccw(c2528.39,814.32) 2575.21,814.32 ; 2575.21,850.53 ccw(c2673.25,850.53) D11.A@2603.93,781.21 ; U11.3@2575.21,1019.41 2575.21,760 D11.A@2585.21,750
NetD12_A: D12.A U12.3 | length 387.3
  Top Layer w30: D12.A@2021.5,781.21 ccw(c1988.39,814.32) 2035.21,814.32 ; 2035.21,850.53 ccw(c2133.25,850.53) D12.A@2063.93,781.21 ; U12.3@2035.21,1019.41 2035.21,760 D12.A@2045.21,750